# EAGLE board STM32 based (EAGLE 9.3.1)

Size 160 x 100 mm. Coordinates in mm from the lower left corner, seen from the top.
Outline: 0,0 160,0 160,100 0,100 0,0
Copper layers (1*16): Top 0.035mm / dielectric 1.5mm / Bottom 0.035mm
Design rules "default": minimum track width 6mil, minimum drill 0.35mm, track to track 6mil, track to pad 6mil, pad to pad 6mil, via to via 6mil, smd to smd 6mil, copper to edge 40mil, drill to drill 6mil, minimum pad ring 10mil, minimum via ring 8mil, stop-mask expansion 4mil, vias tented up to drill 0mil, thermal gap 10mil

## Footprints (pad centres in the part's own frame; a part is rotated, then mirrored left to right if it is on the bottom)
C1206 = smd 1.6 x 1.8: 1 -1.4,0; 2 1.4,0
TO220L1 = drill 1.016 long: 1 -2.54,-3.81; 2 0,-3.81; 3 2.54,-3.81 | hole 3.302: 0,11.176
R0402 = smd 0.6 x 0.7: 1 -0.5,0; 2 0.5,0
DIP880W50P254L2034H450Q16 = drill 0.93 pad 1.4 square: 1 -4.4,8.89 | drill 0.93 pad 1.4: 2 -4.4,6.35; 3 -4.4,3.81; 4 -4.4,1.27; 5 -4.4,-1.27; 6 -4.4,-3.81; 7 -4.4,-6.35; 8 -4.4,-8.89; 9 4.4,-8.89; 10 4.4,-6.35; 11 4.4,-3.81; 12 4.4,-1.27; 13 4.4,1.27; 14 4.4,3.81; 15 4.4,6.35; 16 4.4,8.89
40-DIP-BLUE-PIL = drill 0.8 square: P$1 -7.62,22.86; P$40 7.62,22.86 | drill 0.8: P$2 -7.62,20.32; P$3 -7.62,17.78; P$4 -7.62,15.24; P$5 -7.62,12.7; P$6 -7.62,10.16; P$7 -7.62,7.62; P$8 -7.62,5.08; P$9 -7.62,2.54; P$10 -7.62,0; P$11 -7.62,-2.54; P$12 -7.62,-5.08; P$13 -7.62,-7.62; P$14 -7.62,-10.16; P$15 -7.62,-12.7; P$16 -7.62,-15.24; P$17 -7.62,-17.78; P$18 -7.62,-20.32; P$19 -7.62,-22.86; P$20 -7.62,-25.4; P$21 7.62,-25.4; P$22 7.62,-22.86; P$23 7.62,-20.32; P$24 7.62,-17.78; P$25 7.62,-15.24; P$26 7.62,-12.7; P$27 7.62,-10.16; P$28 7.62,-7.62; P$29 7.62,-5.08; P$30 7.62,-2.54; P$31 7.62,0; P$32 7.62,2.54; P$33 7.62,5.08; P$34 7.62,7.62; P$35 7.62,10.16; P$36 7.62,12.7; P$37 7.62,15.24; P$38 7.62,17.78; P$39 7.62,20.32
SO8 = smd 0.66 x 2.032: 1 -1.905,-3.073; 2 -0.635,-3.073; 3 0.635,-3.073; 4 1.905,-3.073; 5 1.905,3.073; 6 0.635,3.073; 7 -0.635,3.073; 8 -1.905,3.073

## Placement (x,y rotation side)
C1  10 uF/35V  [C1206]  17.78,24.13 0 top
C2  10 uF/35V  [C1206]  17.78,19.05 0 top
C3  10 uF/35V  [C1206]  17.78,13.97 0 top
IC1  [TO220L1]  20.32,34.29 0 top
R1  1k ohm  [R0402]  -11.43,-2.54 0 top  (outside the outline)
R2  1k ohm  [R0402]  -11.43,-6.35 0 top  (outside the outline)
R3  1k ohm  [R0402]  -11.43,-10.16 0 top  (outside the outline)
R4  1k ohm  [R0402]  -11.43,-13.97 0 top  (outside the outline)
R5  1k ohm  [R0402]  -11.43,-17.78 0 top  (outside the outline)
R6  47k ohm  [R0402]  -11.43,-25.4 0 top  (outside the outline)
R7  1k ohm  [R0402]  -11.43,-29.21 0 top  (outside the outline)
R8  1k ohm  [R0402]  -11.43,-39.37 0 top  (outside the outline)
U1  LTV-846  [DIP880W50P254L2034H450Q16]  -6.35,13.97 0 top
U$1  BLUEPILL  [40-DIP-BLUE-PIL]  110.49,54.61 0 top
U$2  SN65HVD230/1  [SO8]  49.53,86.36 0 top

## Library data of the parts
C1-C3 = eagle-ltspice; SPICEMODEL: NONE; SPICEPREFIX: C
IC1 = v-reg-3
R1-R8 = rcl; SPICEPREFIX: R
U1 = LTV-846; AVAILABILITY: Unavailable; DESCRIPTION: LTV Series Quad Channel 80 V 5000 Vrms Transistor Output Optocoupler - DIP-16; MF: Lite-On Inc.; MP: LTV-846; PACKAGE: DIP-16 Lite-On; PRICE: None
U$1 = maplemini
U$2 = texas_instruments

## Nets
3V3: C2.2 C3.2 IC1.3 U1.3 U1.14 U$1.P$18 U$1.P$40 U$2.3
12V: C1.1 IC1.1
CANH: U$2.7
CANL: U$2.6
CANRX: U$1.P$36 U$2.4
CANTX: U$1.P$37 U$2.1
DRL_MPX: R7.2
DRL_SWITCH: R2.1
GND: C1.2 C2.1 C3.1 IC1.2 U1.2 U1.6 U1.8 U1.9 U1.11 U1.15 U$1.P$19 U$1.P$20 U$1.P$39 U$2.2
HDL_MPX: R5.2
N$1: R1.2 U1.1
N$2: R2.2 U1.4
N$3: R3.2 U1.5
N$4: R4.2 U1.7
N$5: R5.1 U1.16
N$7: R6.1 U1.13
N$8: R8.1 U1.10
N$13: R7.1 U1.12
PA11: R4.1 U$1.P$28
PB11: U$1.P$16 U$2.8
PB13: R3.1 U$1.P$22
PB14: R6.2 U$1.P$23
PB15: R1.1 U$1.P$24
TL_MPX: R8.2

## Tracks (layer width: path | path; a pad name or v marks a point on that pad's centre or on a via)
3V3  (7 unrouted)
12V  (1 unrouted)
CANRX  (1 unrouted)
CANTX  (1 unrouted)
GND  (13 unrouted)
N$1  (1 unrouted)
N$2  (1 unrouted)
N$3  (1 unrouted)
N$4  (1 unrouted)
N$5  (1 unrouted)
N$7  (1 unrouted)
N$8  (1 unrouted)
N$13  (1 unrouted)
PA11  (1 unrouted)
PB11  (1 unrouted)
PB13  (1 unrouted)
PB14  (1 unrouted)
PB15  (1 unrouted)